# Altium PCB 6-SON.PcbDoc
Units mm, origin at the board's own origin, x right, y up, seen from the top; angles counter-clockwise.
Board outline 13.87 x 12.25 mm, 2 copper layers (Top Layer, Bottom Layer); 3 components, 8 nets, 15 pads, 0 vias.
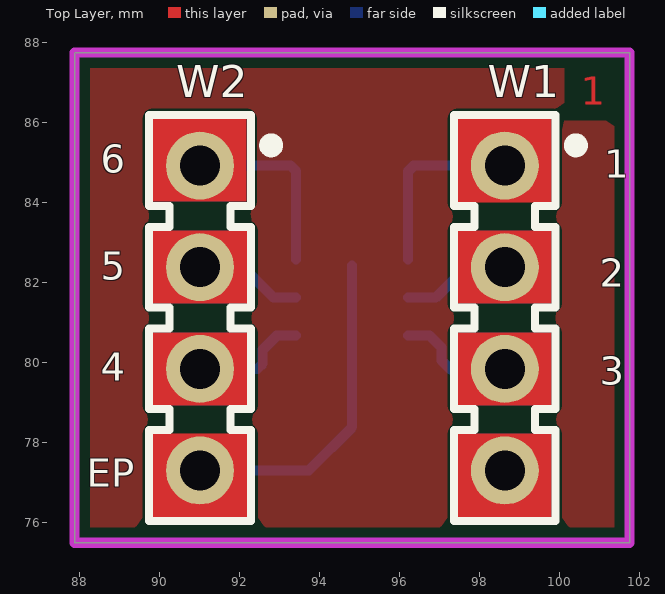
[diagram p0: Top Layer view]
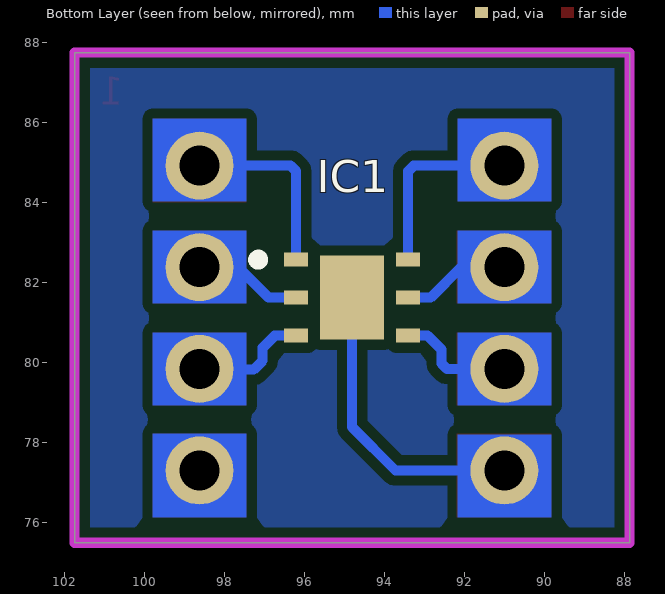
[diagram p1: Bottom Layer view, seen from below]

## Layer stack, top to bottom
Top Solder: solder mask 0.0102, Solder Resist, Dk 3.5
Top Layer: signal copper 0.0356
Dielectric 1: dielectric 0.32, FR-4, Dk 4.8
Bottom Layer: signal copper 0.0356
Bottom Solder: solder mask 0.0102, Solder Resist, Dk 3.5

## Board outline
87.875,75.499 87.875,87.75 101.75,87.75 101.75,75.499

## Design rules (kind name [scope] priority, off if disabled: settings)
Clearance Clearance_1 [InNamedPolygon('Top Layer-No Net')] p1: gap=0.254 ignorepadtopadclearanceinfootprint=FALSE except(0: Arc-Hole Track-Hole SMDPad-Hole THPad-Hole Via-Hole Fill-Hole Poly-Hole Region-Hole Text-Hole)
Clearance [All] p2: gap=0.254 ignorepadtopadclearanceinfootprint=FALSE except(0: Arc-Hole Track-Hole SMDPad-Hole THPad-Hole Via-Hole Fill-Hole Poly-Hole Region-Hole Text-Hole)
MinimumSolderMaskSliver [All] p1: minsoldermaskwidth=0.009
PolygonConnect [All] p1: connectstyle=Relief reliefconductorwidth=0.254 reliefentries=4 polygonreliefangle="90 Angle" airgapwidth=0.254
RoomDefinition 6-SON [InComponentClass('6-SON')] p1: confinementstyle=ConfineIn formatcopy=TRUE lockcomponents=FALSE outline 88,75.625 101.65,75.625 101.65,87.625 88,87.625
RoutingVias [All] p1: holewidth=0.711 width=1.27 viastyle="Through Hole" minholewidth=0.711 minwidth=1.27 maxholewidth=0.711 maxwidth=1.27
SilkToSilkClearance [All] p1: silktosilkclearance=0.125
SolderMaskExpansion [All] p1: expansion=0.102
Width [All] p1: maxlimit=0.254 minlimit=0.254 preferedwidth=0.254
28 further rules are at their usual default settings.

## Components (designator, comment, footprint, x,y, rotation, side; value= is the part's Value field where it differs from the comment)
IC1 "LM71CISD" SON95P300X300X80-7N-R160X210-NGG0006A 94.813,81.625 r180 bottom
W1 "Header 4" SAMTEC_TSW-104-23-L-S 98.628,84.925 r270 top
W2 "Header 4" SAMTEC_TSW-104-23-L-S 91.008,84.925 r270 top

## Footprints (in the part's own frame and the unit in brackets; to place one, negate y for a bottom-side part, rotate by r counter-clockwise, add the part's x,y. Pads: shape width x height; smd on the part's side, far side on the other; paste and mask are expansions set on the pad)
SAMTEC_TSW-104-23-L-S [mm] "4 Contacts - Pitch 2.54mm - Single Row  Through Mount Straigh Header (Post Lead 5.84mm, Tail Lead 2.92mm, Insulator 2.54mm)"
  round 1.7 hole 1: 1(0,0) 2(2.54,0) 3(5.08,0) 4(7.62,0)
  silkscreen extent -1.27,-1.27 8.89,1.93, body extent -1.27,-1.27 8.89,1.27, height 8.38
SON95P300X300X80-7N-R160X210-NGG0006A [mm] "SON, 0.95mm Pitch; 6 Pin, 3.00mm W X 3mm L X 0.80mm H body (w/Thermal Tab 1.6mm x 2.1mm)"
  rect 0.6x0.35 smd: 1(-1.4,0.95) 2(-1.4,0) 3(-1.4,-0.95) 4(1.4,-0.95) 5(1.4,0) 6(1.4,0.95)
  rect 1.6x2.1 smd: 7(0,0)
  silkscreen extent -2.48,0.83 -2.23,1.07, body extent -1.55,-1.55 1.55,1.55, height 0.8

## Part data
IC1: "LM71/LM71-Q1 SPI/MICROWIRE 13-Bit Plus Sign Temperature Sensor", Manufacturer="TEXAS INSTRUMENTS", Author="LNLS DIG LOS", ComponentHeight=0.8mm, Component Type=Standard, CreateDate=10/07/2017, Device=LM71CISD, LatestRevisionDate=10/07/2017, Manufacturer Part Number=LM71CISD, Mounted=Yes, PackageDescription="SON, 0.95mm Pitch; 6 Pin, 3.00mm W X 3mm L X 0.80mm H body (w/Thermal Tab 1.6mm x 2.1mm)", Part Description="LM71/LM71-Q1 SPI/MICROWIRE 13-Bit Plus Sign Temperature Sensor", Part Number=LM71CISD, Pin Count=6, PressFit=No, SMD=Yes, Socket=No
W1 W2: library part SAMTEC_TSW-104-23-L-S, "4 Mini Wire-Wrap Contact Strip Header", Manufacturer=SAMTEC, Manufacturer Part Number=TSW-104-23-L-S, Author="CERN DEM JLC", ComponentHeight=8.38mm, Component Type=Standard, CreateDate=10/10/2012, Family="Header 4", HelpURL=\\cern.ch\dfs\Applications\Altium\Datasheets\SAMTEC_TSW-104-23-L-S.pdf, LatestRevisionDate=10/10/2012, Mounted=Yes, Part Description="4 Contacts - Pitch 2.54mm - Single Row  Through Mount Straight Header (Post Lead 5.84mm, Tail Lead 2.92mm, Insulator 2.54mm)", Part Number=SAMTEC_TSW-104-23-L-S, Pin Count=4, PressFit=No, Sense=No, SMD=No, Socket=No, Status=None

## Nets (pads, with @x,y where several pads share a name; then routed paths per layer and width w, separated by ;. In a path a pad name is that pad's centre, name@x,y a point inside that pad or via, vN(x,y) a via of type N, cw(c..) or ccw(c..) an arc to the next point about the centre after c; other vN are vias at no path point)
NetIC1_1: IC1.1 W1.1 | length 4.7
  Bottom Layer w0.254: IC1.1 96.212,84.788 96.35,84.925 W1.1
NetIC1_2: IC1.2 W1.2 | length 2.8
  Bottom Layer w0.254: IC1.2 96.9,81.625 97.66,82.385 W1.2 W1.2@98.563,82.45
NetIC1_3: IC1.3 W1.3 | length 3
  Bottom Layer w0.254: IC1.3 96.75,80.675 97.05,80.375 97.05,80.05 97.275,79.825 98.608,79.825 W1.3
NetIC1_4: IC1.4 W2.3 | length 3
  Bottom Layer w0.254: W2.3 92.445,79.845 92.575,79.975 92.575,80.325 92.925,80.675 IC1.4
NetIC1_5: IC1.5 W2.2 | length 3
  Bottom Layer w0.254: W2.2@91.008,82.804 91.396,82.804 91.694,82.506 91.694,82.385 92.09,82.385 92.85,81.625 IC1.5
NetIC1_6: IC1.6 W2.1 | length 4.7
  Bottom Layer w0.254: W2.1 93.275,84.925 93.413,84.787 IC1.6
NetIC1_7: IC1.7 W2.4 | length 8.3
  Bottom Layer w0.254: W2.4 93.73,77.305 94.813,78.388 IC1.7@94.813,82.425
PIN_4: W1.4

## Polygon pours and split planes (outlines as drawn)
PIN_4 on Bottom Layer "Top Layer-No Net" (solid, pour order 28): 88,87.575 101.625,87.575 101.625,75.675 88,75.675
PIN_4 on Top Layer "Top Layer-No Net" (solid, pour order 26): 88,87.625 101.65,87.625 101.65,75.625 88,75.625

## Keep-outs
Keep-Out Layer:
  the board outline again, w0.254

## Other copper
Top Layer:
  rectangle net PIN_4: 97.45,76.125 99.8,78.225
  rectangle net NetIC1_3: 97.45,78.925 99.8,80.75
  rectangle net NetIC1_2: 97.45,81.475 99.8,83.3
  rectangle net NetIC1_1: 97.45,84 99.8,86.1
  rectangle net NetIC1_7: 89.825,76.125 92.2,78.225
  rectangle net NetIC1_4: 89.825,78.925 92.2,80.75
  rectangle net NetIC1_5: 89.825,81.475 92.2,83.3
  rectangle net NetIC1_6: 89.825,84.025 92.175,86.1
  text "1" at 100.525,86.45 h0.7
Bottom Layer:
  rectangle net PIN_4: 97.45,76.125 99.8,78.225
  rectangle net NetIC1_3: 97.45,78.925 99.8,80.75
  rectangle net NetIC1_2: 97.45,81.475 99.8,83.3
  rectangle net NetIC1_1: 97.45,84.025 99.8,86.1
  rectangle net NetIC1_6: 89.825,84.025 92.175,86.1
  rectangle net NetIC1_5: 89.825,81.475 92.175,83.3
  rectangle net NetIC1_4: 89.825,78.925 92.175,80.75
  rectangle net NetIC1_7: 89.825,76.125 92.175,78.2

## Silkscreen, mask and mechanical layers (free items; w line width, h text height)
Top Overlay:
  text "6" at 88.525,84.75 h0.7
  text "1" at 101.117,84.625 h0.7
  text "5" at 88.525,82.075 h0.7
  text "2" at 101,81.9 h0.7
  text "4" at 88.525,79.55 h0.7
  text "3" at 101,79.45 h0.7
  text "EP" at 88.175,76.9 h0.7